# Allegro board CHRG_V1.brd
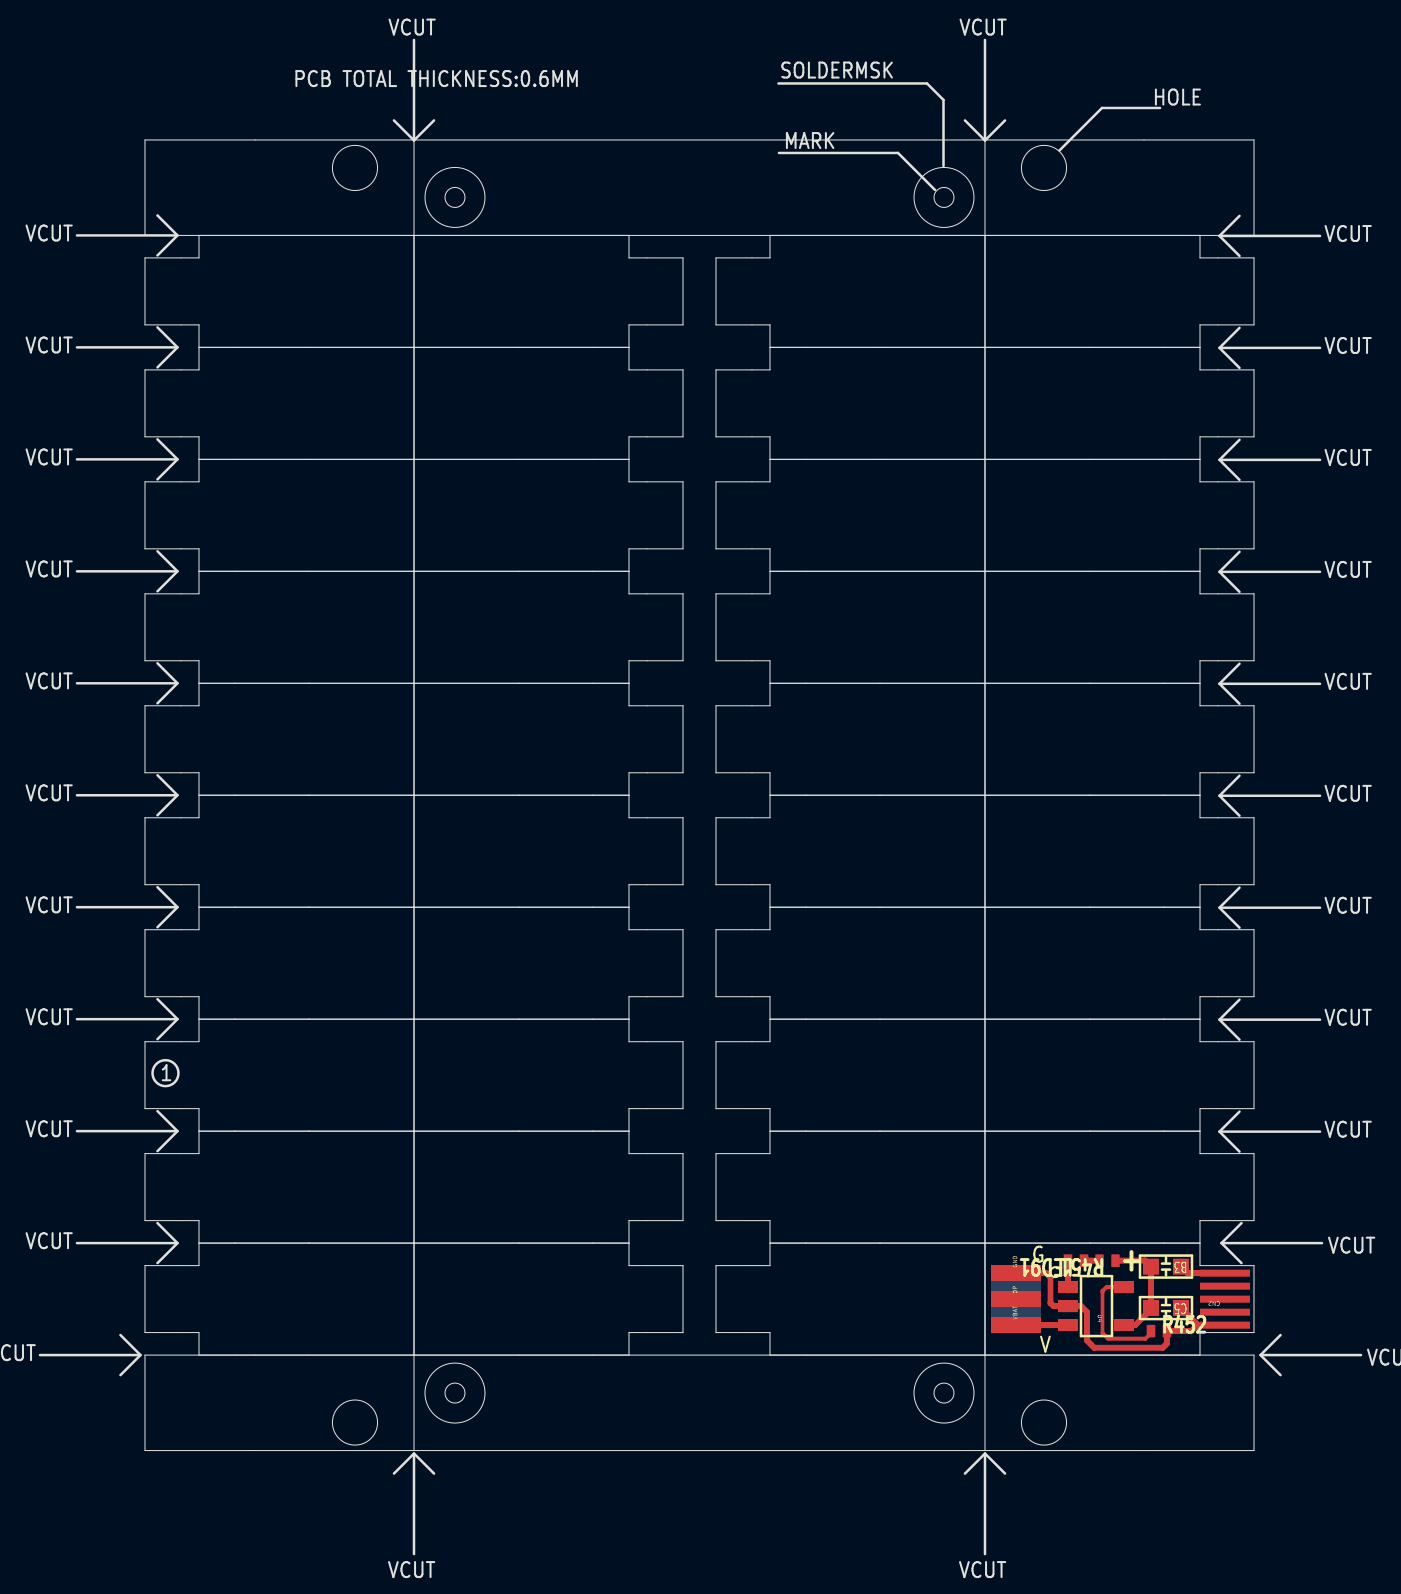
[diagram p0: board, top side]
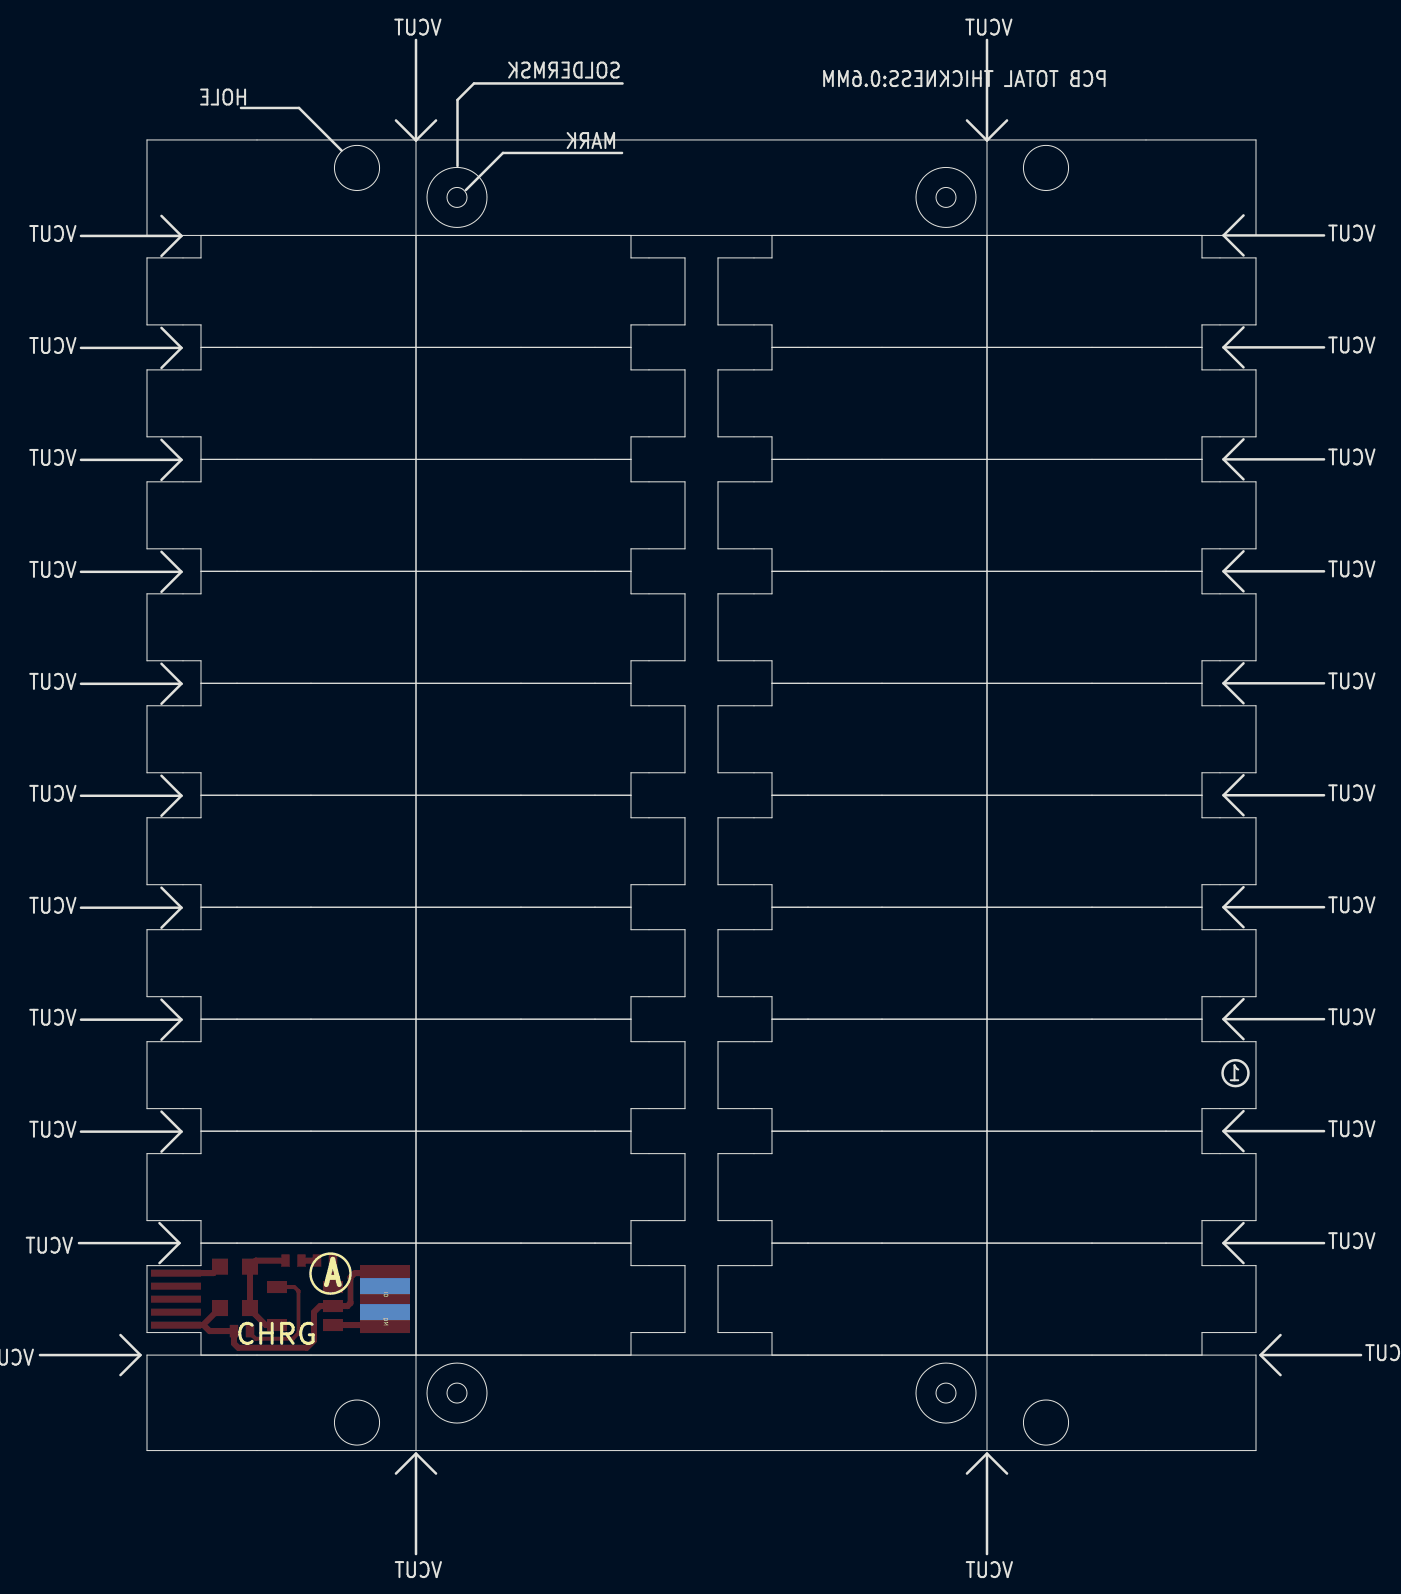
[diagram p1: board, bottom side, seen from below]

Outline 66.05 x 75.72 mm; copper layers: TOP, BOTTOM. Coordinates in mm from the lower left corner of the outline.
Outline path: circle c6.27,24.05 r0.65 ; circle c15.75,69.33 r1.13 ; circle c15.75,6.58 r1.13 ; circle c20.75,67.85 r0.5 ; circle c20.75,67.85 r1.5 ; circle c20.75,8.05 r0.5 ; circle c20.75,8.05 r1.5 ; circle c45.2,67.85 r0.5 ; circle c45.2,67.85 r1.5 ; circle c45.2,8.05 r0.5 ; circle c45.2,8.05 r1.5 ; circle c50.2,69.33 r1.13 ; circle c50.2,6.58 r1.13 ; 5,9.95 0,9.95 ; 4.02,10.95 5.02,9.95 4.02,8.95 ; 6.85,65.95 1.85,65.95 ; 6.85,60.35 1.85,60.35 ; 6.85,54.75 1.85,54.75 ; 6.85,49.15 1.85,49.15 ; 6.85,43.55 1.85,43.55 ; 6.85,37.95 1.85,37.95 ; 6.85,32.35 1.85,32.35 ; 6.85,26.75 1.85,26.75 ; 6.85,21.15 1.85,21.15 ; 6.85,15.55 1.85,15.55 ; 5.88,66.95 6.88,65.95 5.88,64.95 ; 5.88,61.35 6.88,60.35 5.88,59.35 ; 5.88,55.75 6.88,54.75 5.88,53.75 ; 5.88,50.15 6.88,49.15 5.88,48.15 ; 5.88,44.55 6.88,43.55 5.88,42.55 ; 5.88,38.95 6.88,37.95 5.88,36.95 ; 5.88,33.35 6.88,32.35 5.88,31.35 ; 5.88,27.75 6.88,26.75 5.88,25.75 ; 5.88,22.15 6.88,21.15 5.88,20.15 ; 5.88,16.55 6.88,15.55 5.88,14.55 ; 7.95,60.35 7.95,61.48 5.25,61.48 5.25,64.83 7.95,64.83 7.95,65.95 18.7,65.95 ; 7.95,60.35 9.75,60.35 ; 7.95,60.35 7.95,59.23 5.25,59.23 5.25,55.88 7.95,55.88 7.95,54.75 ; 7.95,60.35 9.75,60.35 ; 9.75,60.35 13.45,60.35 ; 9.75,60.35 13.45,60.35 ; 7.95,54.75 9.75,54.75 ; 7.95,54.75 7.95,53.62 5.25,53.62 5.25,50.27 7.95,50.27 7.95,49.15 ; 7.95,54.75 9.75,54.75 ; 9.75,54.75 13.45,54.75 ; 9.75,54.75 13.45,54.75 ; 7.95,49.15 9.75,49.15 ; 7.95,49.15 7.95,48.02 5.25,48.02 5.25,44.67 7.95,44.67 7.95,43.55 ; 7.95,49.15 9.75,49.15 ; 9.75,49.15 13.45,49.15 ; 9.75,49.15 13.45,49.15 ; 7.95,43.55 9.75,43.55 ; 7.95,43.55 7.95,42.42 5.25,42.42 5.25,39.08 7.95,39.08 7.95,37.95 ; 7.95,43.55 9.75,43.55 ; 9.75,43.55 13.45,43.55 ; 9.75,43.55 13.45,43.55 ; 7.95,37.95 9.75,37.95 ; 7.95,37.95 7.95,36.83 5.25,36.83 5.25,33.48 7.95,33.48 7.95,32.35 ; 7.95,37.95 9.75,37.95 ; 9.75,37.95 13.45,37.95 ; 9.75,37.95 13.45,37.95 ; 7.95,32.35 9.75,32.35 ; 7.95,32.35 7.95,31.23 5.25,31.23 5.25,27.88 7.95,27.88 7.95,26.75 ; 7.95,32.35 9.75,32.35 ; 9.75,32.35 13.45,32.35 ; 9.75,32.35 13.45,32.35 ; 7.95,26.75 9.75,26.75 ; 7.95,26.75 7.95,25.62 5.25,25.62 5.25,22.27 7.95,22.27 7.95,21.15 ; 7.95,26.75 9.75,26.75 ; 9.75,26.75 13.45,26.75 ; 9.75,26.75 13.45,26.75 ; 7.95,21.15 9.75,21.15 ; 7.95,21.15 7.95,20.02 5.25,20.02 5.25,16.68 7.95,16.68 7.95,15.55 ; 7.95,21.15 9.75,21.15 ; 9.75,21.15 13.45,21.15 ; 9.75,21.15 13.45,21.15 ; 7.95,15.55 9.75,15.55 ; 7.95,15.55 7.95,14.43 5.25,14.43 5.25,11.07 7.95,11.07 7.95,9.95 18.7,9.95 ; 7.95,15.55 9.75,15.55 ; 9.75,15.55 13.45,15.55 ; 9.75,15.55 13.45,15.55 ; 13.45,60.35 18.7,60.35 ; 13.45,60.35 18.7,60.35 ; 13.45,54.75 18.7,54.75 ; 13.45,54.75 18.7,54.75 ; 13.45,49.15 18.7,49.15 ; 13.45,49.15 18.7,49.15 ; 13.45,43.55 18.7,43.55 ; 13.45,43.55 18.7,43.55 ; 13.45,37.95 18.7,37.95 ; 13.45,37.95 18.7,37.95 ; 13.45,32.35 18.7,32.35 ; 13.45,32.35 18.7,32.35 ; 13.45,26.75 18.7,26.75 ; 13.45,26.75 18.7,26.75 ; 13.45,21.15 18.7,21.15 ; 13.45,21.15 18.7,21.15 ; 13.45,15.55 18.7,15.55 ; 13.45,15.55 18.7,15.55 ; 18.7,65.95 18.7,70.7 ; 18.7,65.95 18.7,60.35 ; 18.7,65.95 29.45,65.95 29.45,64.83 32.15,64.83 32.15,61.48 29.45,61.48 29.45,60.35 ; 18.7,65.95 18.7,60.35 ; 18.7,60.35 18.7,54.75 ; 18.7,60.35 23.95,60.35 ; 18.7,60.35 18.7,54.75 ; 18.7,60.35 23.95,60.35 ; 18.7,54.75 18.7,49.15 ; 18.7,54.75 23.95,54.75 ; 18.7,54.75 18.7,49.15 ; 18.7,54.75 23.95,54.75 ; 18.7,49.15 18.7,43.55 ; 18.7,49.15 23.95,49.15 ; 18.7,49.15 18.7,43.55 ; 18.7,49.15 23.95,49.15 ; 18.7,43.55 18.7,37.95 ; 18.7,43.55 23.95,43.55 ; 18.7,43.55 18.7,37.95 ; 18.7,43.55 23.95,43.55 ; 18.7,37.95 18.7,32.35 ; 18.7,37.95 23.95,37.95 ; 18.7,37.95 18.7,32.35 ; 18.7,37.95 23.95,37.95 ; 18.7,32.35 18.7,26.75 ; 18.7,32.35 23.95,32.35 ; 18.7,32.35 18.7,26.75 ; 18.7,32.35 23.95,32.35 ; 18.7,26.75 18.7,21.15 ; 18.7,26.75 23.95,26.75 ; 18.7,26.75 18.7,21.15 ; 18.7,26.75 23.95,26.75 ; 18.7,21.15 18.7,15.55 ; 18.7,21.15 23.95,21.15 ; 18.7,21.15 18.7,15.55 ; 18.7,21.15 23.95,21.15 ; 18.7,15.55 18.7,9.95 ; 18.7,15.55 23.95,15.55 ; 18.7,15.55 18.7,9.95 ; 18.7,15.55 23.95,15.55 ; 18.7,70.72 18.7,75.72 ; 18.7,70.7 17.7,71.7 ; 18.7,70.7 19.7,71.7 ; 23.95,60.35 27.65,60.35 ; 23.95,60.35 27.65,60.35 ; 23.95,54.75 27.65,54.75 ; 23.95,54.75 27.65,54.75 ; 23.95,49.15 27.65,49.15 ; 23.95,49.15 27.65,49.15 ; 23.95,43.55 27.65,43.55 ; 23.95,43.55 27.65,43.55 ; 23.95,37.95 27.65,37.95 ; 23.95,37.95 27.65,37.95 ; 23.95,32.35 27.65,32.35 ; 23.95,32.35 27.65,32.35 ; 23.95,26.75 27.65,26.75 ; 23.95,26.75 27.65,26.75 ; 23.95,21.15 27.65,21.15 ; 23.95,21.15 27.65,21.15 ; 18.7,9.95 18.7,5.2 ; 18.7,9.95 29.45,9.95 29.45,11.07 32.15,11.07 32.15,14.43 29.45,14.43 29.45,15.55 ; 23.95,15.55 27.65,15.55 ; 23.95,15.55 27.65,15.55 ; 17.7,4.03 18.7,5.03 19.7,4.03 ; 18.7,5 18.7,0 ; 27.65,60.35 29.45,60.35 ; 27.65,60.35 29.45,60.35 ; 27.65,54.75 29.45,54.75 ; 27.65,54.75 29.45,54.75 ; 27.65,49.15 29.45,49.15 ; 27.65,49.15 29.45,49.15 ; 27.65,43.55 29.45,43.55 ; 27.65,43.55 29.45,43.55 ; 27.65,37.95 29.45,37.95 ; 27.65,37.95 29.45,37.95 ; 27.65,32.35 29.45,32.35 ; 27.65,32.35 29.45,32.35 ; 27.65,26.75 29.45,26.75 ; 27.65,26.75 29.45,26.75 ; 27.65,21.15 29.45,21.15 ; 27.65,21.15 29.45,21.15 ; 27.65,15.55 29.45,15.55 ; 27.65,15.55 29.45,15.55 ; 29.45,60.35 29.45,59.23 32.15,59.23 32.15,55.88 29.45,55.88 29.45,54.75 ; 29.45,54.75 29.45,53.62 32.15,53.62 32.15,50.27 29.45,50.27 29.45,49.15 ; 29.45,49.15 29.45,48.02 32.15,48.02 32.15,44.67 29.45,44.67 29.45,43.55 ; 29.45,43.55 29.45,42.42 32.15,42.42 32.15,39.08 29.45,39.08 29.45,37.95 ; 29.45,37.95 29.45,36.83 32.15,36.83 32.15,33.48 29.45,33.48 29.45,32.35 ; 29.45,32.35 29.45,31.23 32.15,31.23 32.15,27.88 29.45,27.88 29.45,26.75 ; 29.45,26.75 29.45,25.62 32.15,25.62 32.15,22.27 29.45,22.27 29.45,21.15 ; 29.45,21.15 29.45,20.02 32.15,20.02 32.15,16.68 29.45,16.68 29.45,15.55 ; 36.5,60.35 36.5,61.48 33.8,61.48 33.8,64.83 36.5,64.83 36.5,65.95 47.25,65.95 ; 36.5,60.35 38.3,60.35 ; 36.5,60.35 36.5,59.23 33.8,59.23 33.8,55.88 36.5,55.88 36.5,54.75 ; 36.5,60.35 38.3,60.35 ; 38.3,60.35 42,60.35 ; 38.3,60.35 42,60.35 ; 36.5,54.75 38.3,54.75 ; 36.5,54.75 36.5,53.62 33.8,53.62 33.8,50.27 36.5,50.27 36.5,49.15 ; 36.5,54.75 38.3,54.75 ; 38.3,54.75 42,54.75 ; 38.3,54.75 42,54.75 ; 36.5,49.15 38.3,49.15 ; 36.5,49.15 36.5,48.02 33.8,48.02 33.8,44.67 36.5,44.67 36.5,43.55 ; 36.5,49.15 38.3,49.15 ; 38.3,49.15 42,49.15 ; 38.3,49.15 42,49.15 ; 36.5,43.55 38.3,43.55 ; 36.5,43.55 36.5,42.42 33.8,42.42 33.8,39.08 36.5,39.08 36.5,37.95 ; 36.5,43.55 38.3,43.55 ; 38.3,43.55 42,43.55 ; 38.3,43.55 42,43.55 ; 36.5,37.95 38.3,37.95 ; 36.5,37.95 36.5,36.83 33.8,36.83 33.8,33.48 36.5,33.48 36.5,32.35 ; 36.5,37.95 38.3,37.95 ; 38.3,37.95 42,37.95 ; 38.3,37.95 42,37.95 ; 36.5,32.35 38.3,32.35 ; 36.5,32.35 36.5,31.23 33.8,31.23 33.8,27.88 36.5,27.88 36.5,26.75 ; 36.5,32.35 38.3,32.35 ; 38.3,32.35 42,32.35 ; 38.3,32.35 42,32.35 ; 36.5,26.75 38.3,26.75 ; 36.5,26.75 36.5,25.62 33.8,25.62 33.8,22.27 36.5,22.27 36.5,21.15 ; 36.5,26.75 38.3,26.75 ; 38.3,26.75 42,26.75 ; 38.3,26.75 42,26.75 ; 36.5,21.15 38.3,21.15 ; 36.5,21.15 36.5,20.02 33.8,20.02 33.8,16.68 36.5,16.68 36.5,15.55 ; 36.5,21.15 38.3,21.15 ; 38.3,21.15 42,21.15 ; 38.3,21.15 42,21.15 ; 36.5,15.55 38.3,15.55 ; 36.5,15.55 36.5,14.43 33.8,14.43 33.8,11.07 36.5,11.07 36.5,9.95 47.25,9.95 ; 36.5,15.55 38.3,15.55 ; 38.3,15.55 42,15.55 ; 38.3,15.55 42,15.55 ; 36.93,73.55 44.35,73.55 45.18,72.72 45.18,69.42 ; 36.95,70.08 42.9,70.08 44.75,68.22 ; 42,60.35 47.25,60.35 ; 42,60.35 47.25,60.35 ; 42,54.75 47.25,54.75 ; 42,54.75 47.25,54.75 ; 42,49.15 47.25,49.15 ; 42,49.15 47.25,49.15 ; 42,43.55 47.25,43.55 ; 42,43.55 47.25,43.55 ; 42,37.95 47.25,37.95 ; 42,37.95 47.25,37.95 ; 42,32.35 47.25,32.35 ; 42,32.35 47.25,32.35 ; 42,26.75 47.25,26.75 ; 42,26.75 47.25,26.75 ; 42,21.15 47.25,21.15 ; 42,21.15 47.25,21.15 ; 42,15.55 47.25,15.55 ; 42,15.55 47.25,15.55 ; 47.25,65.95 47.25,70.7 ; 47.25,65.95 47.25,60.35 ; 47.25,65.95 58,65.95 58,64.83 60.7,64.83 60.7,61.48 58,61.48 58,60.35 ; 47.25,65.95 47.25,60.35 ; 47.25,60.35 47.25,54.75 ; 47.25,60.35 52.5,60.35 ; 47.25,60.35 47.25,54.75 ; 47.25,60.35 52.5,60.35 ; 47.25,54.75 47.25,49.15 ; 47.25,54.75 52.5,54.75 ; 47.25,54.75 47.25,49.15 ; 47.25,54.75 52.5,54.75 ; 47.25,49.15 47.25,43.55 ; 47.25,49.15 52.5,49.15 ; 47.25,49.15 47.25,43.55 ; 47.25,49.15 52.5,49.15 ; 47.25,43.55 47.25,37.95 ; 47.25,43.55 52.5,43.55 ; 47.25,43.55 47.25,37.95 ; 47.25,43.55 52.5,43.55 ; 47.25,37.95 47.25,32.35 ; 47.25,37.95 52.5,37.95 ; 47.25,37.95 47.25,32.35 ; 47.25,37.95 52.5,37.95 ; 47.25,32.35 47.25,26.75 ; 47.25,32.35 52.5,32.35 ; 47.25,32.35 47.25,26.75 ; 47.25,32.35 52.5,32.35 ; 47.25,26.75 47.25,21.15 ; 47.25,26.75 52.5,26.75 ; 47.25,26.75 47.25,21.15 ; 47.25,26.75 52.5,26.75 ; 47.25,21.15 47.25,15.55 ; 47.25,21.15 52.5,21.15 ; 47.25,21.15 47.25,15.55 ; 47.25,21.15 52.5,21.15 ; 47.25,15.55 47.25,9.95 ; 47.25,15.55 52.5,15.55 ; 47.25,15.55 47.25,9.95 ; 47.25,15.55 52.5,15.55 ; 47.25,70.72 47.25,75.72 ; 47.25,70.7 46.25,71.7 ; 47.25,70.7 48.25,71.7 ; 52.5,60.35 56.2,60.35 ; 52.5,60.35 56.2,60.35 ; 52.5,54.75 56.2,54.75 ; 52.5,54.75 56.2,54.75 ; 52.5,49.15 56.2,49.15 ; 52.5,49.15 56.2,49.15 ; 52.5,43.55 56.2,43.55 ; 52.5,43.55 56.2,43.55 ; 52.5,37.95 56.2,37.95 ; 52.5,37.95 56.2,37.95 ; 52.5,32.35 56.2,32.35 ; 52.5,32.35 56.2,32.35 ; 52.5,26.75 56.2,26.75 ; 52.5,26.75 56.2,26.75 ; 52.5,21.15 56.2,21.15 ; 52.5,21.15 56.2,21.15 ; 47.25,9.95 47.25,5.2 ; 47.25,9.95 58,9.95 58,11.07 60.7,11.07 60.7,14.43 58,14.43 58,15.55 ; 52.5,15.55 56.2,15.55 ; 52.5,15.55 56.2,15.55 ; 46.25,4.03 47.25,5.03 48.25,4.03 ; 47.25,5 47.25,0 ; 56.2,60.35 58,60.35 ; 56.2,60.35 58,60.35 ; 56.2,54.75 58,54.75 ; 56.2,54.75 58,54.75 ; 56.2,49.15 58,49.15 ; 56.2,49.15 58,49.15 ; 56.2,43.55 58,43.55 ; 56.2,43.55 58,43.55 ; 56.2,37.95 58,37.95 ; 56.2,37.95 58,37.95 ; 56.2,32.35 58,32.35 ; 56.2,32.35 58,32.35 ; 56.2,26.75 58,26.75 ; 56.2,26.75 58,26.75 ; 56.2,21.15 58,21.15 ; 56.2,21.15 58,21.15 ; 56.2,15.55 58,15.55 ; 56.2,15.55 58,15.55 ; 50.98,70.2 53.1,72.33 56,72.33 ; 58,60.35 58,59.23 60.7,59.23 60.7,55.88 58,55.88 58,54.75 ; 58,54.75 58,53.62 60.7,53.62 60.7,50.27 58,50.27 58,49.15 ; 58,49.15 58,48.02 60.7,48.02 60.7,44.67 58,44.67 58,43.55 ; 58,43.55 58,42.42 60.7,42.42 60.7,39.08 58,39.08 58,37.95 ; 58,37.95 58,36.83 60.7,36.83 60.7,33.48 58,33.48 58,32.35 ; 58,32.35 58,31.23 60.7,31.23 60.7,27.88 58,27.88 58,26.75 ; 58,26.75 58,25.62 60.7,25.62 60.7,22.27 58,22.27 58,21.15 ; 58,21.15 58,20.02 60.7,20.02 60.7,16.68 58,16.68 58,15.55 ; 59.98,66.92 58.98,65.92 59.98,64.92 ; 59.98,61.33 58.98,60.33 59.98,59.33 ; 59.98,55.73 58.98,54.73 59.98,53.73 ; 59.98,50.12 58.98,49.12 59.98,48.12 ; 59.98,44.52 58.98,43.52 59.98,42.52 ; 59.98,38.92 58.98,37.92 59.98,36.92 ; 59.98,33.33 58.98,32.33 59.98,31.32 ; 59.98,27.73 58.98,26.73 59.98,25.73 ; 59.98,22.12 58.98,21.12 59.98,20.12 ; 59,65.92 64,65.92 ; 59,60.33 64,60.33 ; 59,54.73 64,54.73 ; 59,49.12 64,49.12 ; 59,43.52 64,43.52 ; 59,37.92 64,37.92 ; 59,32.33 64,32.33 ; 59,26.73 64,26.73 ; 59,21.12 64,21.12 ; 60.08,16.55 59.08,15.55 60.08,14.55 ; 59.1,15.55 64.1,15.55 ; 62.03,10.95 61.03,9.95 62.03,8.95 ; 61.05,9.95 66.05,9.95 ; 5.25,70.72 60.7,70.72 60.7,65.95 5.25,65.95 5.25,70.72 ; 5.25,9.95 60.7,9.95 60.7,5.17 5.25,5.17 5.25,9.95

## Placement (name value [footprint] x y rotation side)
B3  INDUCTOR  [SC0603]  56.3 14.38 180 top
C5  C  [SC0603]  56.3 12.3 180 top
CN2  5_CON  [MICROUSB_V009]  59.35 12.75 180 top
DM  SOLDPAD  [SOLDPAD_0P8X2P5]  48.8 12.1 270 bottom
DP  SOLDPAD  [SOLDPAD_0P8X2P5]  48.8 12.75 90 top
GND  SOLDPAD  [SOLDPAD_0P8X2P5]  48.8 14.05 90 top
ID  SOLDPAD  [SOLDPAD_0P8X2P5]  48.8 13.4 270 bottom
LED91  GREEN/NC  [LED0402_V009]  51.8 14.68 180 top
R451  R  [LED0402_V009]  53.38 14.68 180 top
R452  R  [LED0402_V009]  55.95 11.15 0 top
U4  LTC4054L  [TSOT-23]  52.8 12.4 270 top
VBAT  SOLDPAD  [SOLDPAD_0P8X2P5]  48.8 11.45 90 top

## Library data of the parts
B3 = INDUCTOR
C5 = C
CN2 = 5_CON
DM DP GND ID VBAT = TP_SMD_1_5cir
LED91 = LED1
R451 R452 = R
U4 = LTC4054L

## Footprints (pads in the part's own frame, mm; a bottom-side part is the same pattern mirrored in y, then rotated)
LED0402_V009
  rect 0.425x0.625 smd: 1(-0.4,0) 2(0.4,0)
MICROUSB_V009
  rect 2.5x0.35 smd: 1(0.1,-1.3) 2(0.1,-0.65) 3(0.1,0) 4(0.1,0.65) 5(0.1,1.3)
SC0603
  rect 0.8x0.8 smd: 1(-0.75,0) 2(0.75,0)
SOLDPAD_0P8X2P5
  rect 0.8x2.5 smd: 1(0,0)
TSOT-23
  rect 0.6x1 smd: 1(-0.95,-1.4) 2(0,-1.4) 3(0.95,-1.4) 4(0.95,1.4) 5(-0.95,1.4)

## Nets
GND: C5.1 CN2.5 GND.1 R452.2 U4.2(GND)
VBAT: U4.3(BAT) VBAT.1
VBUS: B3.2 C5.2 R451.1 U4.4(VCC)
N7864328: LED91.1 R451.2
N7864344: LED91.2 U4.1(/CHRG)
N7864374: R452.1 U4.5(PROG)
N86515080: B3.1 CN2.1

Pads without a net: CN2 2 3 4; DM 1; DP 1; ID 1

## Routing (per net, layer and track width the routed paths; a pad name or vN(x,y) marks a point on that pad's centre or on a via; arc(x,y) is an arc through that point)
GND: length 15.6
  TOP w0.3: CN2.5 57.88,11.45 ; GND.1 50.31,14.05 50.52,13.84 50.52,12.55 50.68,12.4 52.05,12.4 52.35,12.1 52.35,10.68 52.71,10.31 56.14,10.31 56.35,10.53 R452.2 57.58,11.15 57.88,11.45 ; 57.88,11.45 57.88,11.47 C5.1
VBAT: length 2.6
  TOP w0.3: 51.4,11.45 VBAT.1
VBUS: length 5.7
  TOP w0.3: R451.1 55.25,14.68 B3.2 C5.2 55.55,12.24 54.76,11.45 U4.4
N7864328: length 0.8
  TOP w0.3: R451.2 LED91.1
N7864344: length 1.3
  TOP w0.3: 51.4,13.35 51.4,14.68
N7864374: length 6
  TOP w0.2: U4.5 53.33,13.35 53.12,13.15 53.12,11.05 53.41,10.77 55.27,10.77 55.55,11.05 R452.1
N86515080: length 2.3
  TOP w0.3: B3.1 57.38,14.05 CN2.1

## Text on the board
Ref Des/Silkscreen Bottom: A | CHRG
Board Geometry/Outline: VCUT | 1 | PCB TOTAL THICKNESS:0.6MM | SOLDERMSK | MARK | HOLE
Ref Des/Silkscreen Top: G | V
NCLEGEND-1-2: FIGURE | SIZE | 0.15 | DRILL CHART: TOP to BOTTOM | ALL UNITS ARE IN MILLIMETERS | PLATED | QTY | 48
